# EAGLE board mainBoard2 (EAGLE 9.5.2)

Size 50.2 x 52.8 mm. Coordinates in mm from the lower left corner, seen from the top.
Outline: 0,0 50.2,0 50.2,52.8 0,52.8 0,0
Copper layers (1*16): Top 0.035mm / dielectric 1.5mm / Bottom 0.035mm
Design rules "default": minimum track width 10mil, minimum drill 24mil, track to track 8mil, track to pad 8mil, pad to pad 8mil, via to via 8mil, smd to smd 8mil, copper to edge 40mil, drill to drill 8mil, minimum pad ring 10mil, minimum via ring 8mil, stop-mask expansion 4mil, vias tented up to drill 0mil, thermal gap 10mil
Holes 0.35 mm at -6.8,18.8 -6.2,26 -6.6,14.8

## Footprints (pad centres in the part's own frame; a part is rotated, then mirrored left to right if it is on the bottom)
2,15/1,0 = drill 1.016 pad 2.159 octagon: 1 0,0
FE01-1 = drill 0.813 long: 1 -1.27,0
C025-024X044 = drill 0.813 octagon: 1 -1.27,0; 2 1.27,0
1503_09 = drill 0.8 pad 1.2 long: 1 0,-2.1; 2 -4.55,-5.4; 3 5.05,-9.9; 4 -4,-13.1; 5 2.65,-8.5
FE02-1 = drill 0.813 long: 1 -1.27,0; 2 1.27,0
FE03-1 = drill 0.813 long: 1 -5.08,0; 2 -2.54,0; 5 0,0
MA03-1 = drill 1.016 long: 1 -2.54,0; 2 0,0; 3 2.54,0
0204/7 = drill 0.813 octagon: 1 -3.81,0; 2 3.81,0
MA06-1 = drill 1.016 long: 1 -6.35,0; 2 -3.81,0; 3 -1.27,0; 4 1.27,0; 5 3.81,0; 6 6.35,0
DIL08 = drill 0.813 long: 1 -3.81,-3.81; 2 -1.27,-3.81; 3 1.27,-3.81; 4 3.81,-3.81; 5 3.81,3.81; 6 1.27,3.81; 7 -1.27,3.81; 8 -3.81,3.81

## Placement (x,y rotation side)
E$1  [2,15/1,0]  -6.1,10.2 180 top  (outside the outline)
E$2  [2,15/1,0]  -6.7,18.8 180 top  (outside the outline)
E$3  [FE01-1]  44.5,50.2 180 top
E$4  [FE01-1]  37.4,50.2 180 top
E$5  [C025-024X044]  14.2,14.6 180 top
E$6  [2,15/1,0]  -6.3,26.1 180 top  (outside the outline)
E$7  [1503_09]  7.3,51.78 0 top
E$8  [2,15/1,0]  -6.2,6.9 180 top  (outside the outline)
E$9  [2,15/1,0]  -6.4,14.9 180 top  (outside the outline)
E$10  [2,15/1,0]  -9.2,10.3 180 top  (outside the outline)
E$11  [FE02-1]  3.6,32.66 180 top
E$12  [FE03-1]  19.3,20.9 270 top
E$13  TIP 122  [MA03-1]  21.25,6.76 270 top
E$14  [2,15/1,0]  -9,6.9 180 top  (outside the outline)
E$15  [FE01-1]  20.5,31.4 90 top
E$16  [FE01-1]  27.5,31.4 90 top
E$17  [2,15/1,0]  -6.2,3.7 180 top  (outside the outline)
E$18  [FE03-1]  11.3,35.1 90 top
E$20  1k  [0204/7]  5.8,14.63 180 top
E$42  [MA06-1]  26.41,12.08 90 top
E$43  [MA06-1]  47.37,14.62 90 top
E$45  [DIL08]  12.15,22.19 90 top

## Library data of the parts
E$1 E$2 E$6 E$8-E$10 E$14 E$17 = wirepad
E$3 E$4 E$11 E$12 E$15 E$16 E$18 = con-lsta2
E$5 = rcl
E$7 = con-lumberg
E$13 E$42 E$43 = con-lstb
E$20 = eagle-ltspice
E$45 = 74xx-us

## Nets
S$2: E$16.1 E$45.3
S$3: E$42.5 E$45.5
S$4: E$5.2 E$7.1 E$11.2 E$12.2 E$13.1 E$45.4
S$5: E$20.2 E$45.6
S$8: E$11.1 E$18.1
S$9: E$18.2 E$45.7
S$10: E$7.2 E$18.5
S$11: E$13.3 E$20.1
S$13: E$4.1 E$12.1
S$14: E$13.2 E$42.3 E$42.6
S$15: E$3.1 E$5.1 E$7.3 E$42.2 E$45.8
S$16: E$42.4 E$45.2

## Tracks (layer width: path | path; a pad name or v marks a point on that pad's centre or on a via)
S$2  (1 unrouted)
S$3  (1 unrouted)
S$4  (5 unrouted)
S$5  (1 unrouted)
S$8  (1 unrouted)
S$9  (1 unrouted)
S$10  (1 unrouted)
S$11  (1 unrouted)
S$13  (1 unrouted)
S$14  (2 unrouted)
S$15  (4 unrouted)
S$16  (1 unrouted)

## Text on the board
tPlace: 0 out | 5.1 out | G | S | V | switch tilt or external / interrupt | B+ | B- | tilt | switch on off | gnd | txd | rxd | e | key | vcc | c | ant | b | sim800c